# EAGLE board DDS_prototype (EAGLE 9.2.2)
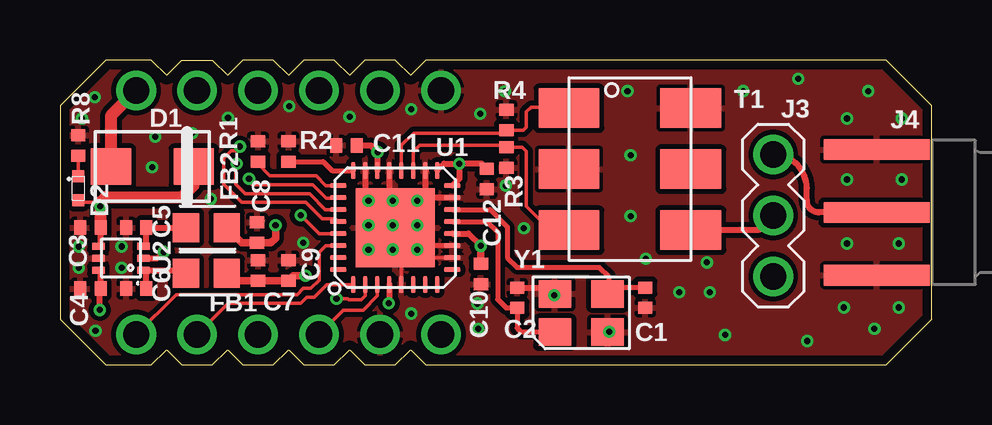
[diagram p0: board, top side]
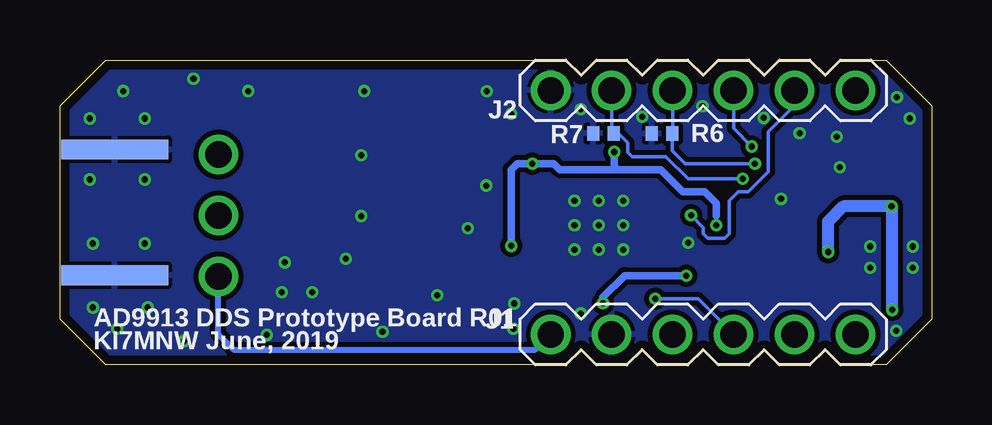
[diagram p1: board, bottom side, seen from below]

Size 36.32 x 12.7 mm. Coordinates in mm from the lower left corner, seen from the top.
Outline: 1.91,0 3.81,0 4.45,0.64 5.08,0 6.35,0 6.99,0.64 7.62,0 8.89,0 9.53,0.64 10.16,0 11.43,0 12.06,0.64 12.7,0 13.97,0 14.61,0.64 15.24,0 34.42,0 36.32,1.91 36.32,10.79 34.42,12.7 15.24,12.7 14.61,12.06 13.97,12.7 12.7,12.7 12.06,12.06 11.43,12.7 10.16,12.7 9.53,12.06 8.89,12.7 7.62,12.7 6.99,12.06 6.35,12.7 5.08,12.7 4.45,12.06 3.81,12.7 1.91,12.7 0,10.79 0,1.91 1.91,0
Copper layers (1*16): Top 0.035559375mm / dielectric 1.6mm / Bottom 0.035559375mm
Design rules "oshpark-2layer-tented *": minimum track width 6mil, minimum drill 10mil, track to track 6mil, track to pad 6mil, pad to pad 6mil, via to via 6mil, smd to smd 6mil, copper to edge 15mil, drill to drill 6mil, minimum pad ring 5mil, minimum via ring 5mil, stop-mask expansion 2.5mil, vias tented up to drill 20mil, thermal gap 6mil
Net classes: 0 default: clearance 0.205 mm

## Footprints (pad centres in the part's own frame; a part is rotated, then mirrored left to right if it is on the bottom)
0402 = smd 0.5 x 0.6: P$1 -0.425,0; P$2 0.425,0
DO-214BA = smd 1.68 x 1.52: A 1.725,0; K -1.725,0
0402' = smd 0.5 x 0.5: A -0.5,0; K 0.5,0
0603 = smd 1.1 x 1.2: P$1 -0.85,0; P$2 0.85,0
1X6_MALE_HEADER_0.1 = drill 1.1: P$1 6.35,0; P$2 3.81,0; P$3 1.27,0; P$4 -1.27,0; P$5 -3.81,0; P$6 -6.35,0
1X3_MALE_HEADER_0.1 = drill 1.1: P$1 2.54,0; P$2 0,0; P$3 -2.54,0
EMPCB.SMAFSTJ.B.HT = smd 0.85 x 4.46: P$1 0,0; P$2 -2.62,0; P$3 2.62,0 | smd 0.85 x 4.46 bottom: P$4 -2.62,0; P$5 2.62,0
CD637 = smd 1.651 x 2.54: P$1 -2.54,-2.54; P$2 0,-2.54; P$3 2.54,-2.54; P$4 2.54,2.54; P$5 0,2.54; P$6 -2.54,2.54
32-LFCSP = smd 0.7 x 0.2: P$1 -2.375,1.75; P$2 -2.375,1.25; P$3 -2.375,0.75; P$4 -2.375,0.25; P$5 -2.375,-0.25; P$6 -2.375,-0.75; P$7 -2.375,-1.25; P$8 -2.375,-1.75; P$17 2.375,-1.75; P$18 2.375,-1.25; P$19 2.375,-0.75; P$20 2.375,-0.25; P$21 2.375,0.25; P$22 2.375,0.75; P$23 2.375,1.25; P$24 2.375,1.75 | smd 0.2 x 0.7: P$9 -1.75,-2.375; P$10 -1.25,-2.375; P$11 -0.75,-2.375; P$12 -0.25,-2.375; P$13 0.25,-2.375; P$14 0.75,-2.375; P$15 1.25,-2.375; P$16 1.75,-2.375; P$25 1.75,2.375; P$26 1.25,2.375; P$27 0.75,2.375; P$28 0.25,2.375; P$29 -0.25,2.375; P$30 -0.75,2.375; P$31 -1.25,2.375; P$32 -1.75,2.375 | smd 3.3 x 3.3: P$33 0,0
SNT-6A = smd 0.3 x 0.52: P1 -0.5,-0.94; P2 0,-0.94; P3 0.5,-0.94; P4 0.5,0.94; P5 0,0.94; P6 -0.5,0.94
TSX-3225 = smd 1.4 x 1.15: P1 -1.1,-0.8; P2 1.1,-0.8; P3 1.1,0.8; P4 -1.1,0.8

## Placement (x,y rotation side)
C1  7pF  [0402]  24.38,2.79 90 top
C2  7pF  [0402]  19.05,2.79 270 top
C3  0.1u  [0402]  1.27,5.71 0 top
C4  1u  [0402]  1.27,3.17 0 top
C5  1u  [0402]  3.17,5.71 0 top
C6  1u  [0402]  3.17,3.17 0 top
C7  0.1u  [0402]  8.26,3.94 270 top
C8  0.1u  [0402]  8.22,5.51 270 top
C9  100p  [0402]  9.53,3.94 270 top
C10  1u  [0402]  17.54,3.78 90 top
C11  0.1u  [0402]  11.94,9.14 0 top
C12  100p  [0402]  17.78,7.75 90 top
D1  LSM115JE3  [DO-214BA]  3.85,8.26 180 top
D2  [0402']  0.76,7.37 90 top
FB1  BLM18KG102SN1D  [0603]  6.1,3.81 0 top
FB2  BLM18KG102SN1D  [0603]  6.1,5.71 0 top
J1  [1X6_MALE_HEADER_0.1]  9.53,1.27 0 bottom
J2  [1X6_MALE_HEADER_0.1]  9.53,11.43 0 bottom
J3  [1X3_MALE_HEADER_0.1]  29.72,6.22 90 top
J4  [EMPCB.SMAFSTJ.B.HT]  34.04,6.35 90 top
R1  100k  [0402]  8.26,8.89 270 top
R2  4.65k  [0402]  9.53,8.89 270 top
R3  49.9  [0402]  18.6,8.64 270 top
R4  49.9  [0402]  18.6,10.21 270 top
R6  100k  [0402]  11.25,9.64 0 bottom
R7  100k  [0402]  13.68,9.64 0 bottom
R8  470  [0402]  0.76,9.14 270 top
T1  ADTT1-6+  [CD637]  23.75,8.15 270 top
U1  AD9913  [32-LFCSP]  13.97,5.71 90 top
U2  S-1711A1818-I6T1U  [SNT-6A]  2.54,4.45 90 top
Y1  TSX-3225 25.0000MF10P-C0  [TSX-3225]  21.72,2.16 0 top

## Library data of the parts
C1-C12 = Capacitors
D1 D2 = Diodes
FB1 FB2 = Inductors
J1-J4 = Connectors
R1-R4 R6-R8 = Resistors
T1 U1 U2 = ICs
Y1 = Crystals

## Nets
3V3: D1.A J2.P$1
3V3_PROT: C3.P$2 C4.P$2 D1.K D2.A U2.P2 U2.P4 U2.P6
CS_N: J2.P$3 U1.P$28
DDS: J3.P$2 T1.P$4
DDS_COAX: J3.P$1 J4.P$1
DDS_OUT: J1.P$6 J3.P$3
GND: C1.P$1 C2.P$1 C3.P$1 C4.P$1 C5.P$1 C6.P$1 C7.P$1 C8.P$1 C9.P$1 C10.P$1 C11.P$1 C12.P$1 J1.P$5 J2.P$6 J4.P$2 J4.P$3 J4.P$4 J4.P$5 R1.P$1 R2.P$1 R3.P$2 R4.P$1 R6.P$1 R7.P$1 R8.P$1 T1.P$2 T1.P$6 U1.P$5 U1.P$10 U1.P$11 U1.P$15 U1.P$18 U1.P$21 U1.P$23 U1.P$33 U2.P5 Y1.P2 Y1.P4
IO_UPDATE: J2.P$4 R6.P$2 U1.P$27
IOUT: R3.P$1 T1.P$3 U1.P$19
IOUT_N: R4.P$2 T1.P$1 U1.P$20
MSTR_RST: R1.P$2 U1.P$25
N$1: D2.K R8.P$2
N$7: C1.P$2 U1.P$14 Y1.P3
N$14: C2.P$2 U1.P$13 Y1.P1
PS0: J1.P$4 U1.P$3
PS1: J1.P$3 U1.P$2
PS2: J1.P$2 U1.P$1
PWR_DWN_CTRL: J2.P$5 R7.P$2 U1.P$26
RSET: R2.P$2 U1.P$24
SCLK: J1.P$1 U1.P$30
SDIO: J2.P$2 U1.P$29
VCC: C8.P$2 C10.P$2 C11.P$2 C12.P$2 FB2.P$2 U1.P$12 U1.P$16 U1.P$17 U1.P$22
VCC_UNFILT: C6.P$2 FB1.P$1 U2.P1
VDD: C7.P$2 C9.P$2 FB1.P$2 U1.P$4
VDD_UNFILT: C5.P$2 FB2.P$1 U2.P3

## Tracks (layer width: path | path; a pad name or v marks a point on that pad's centre or on a via)
3V3
  Top 0.508: J2.P$1 2.12,10.38 D1.A
3V3_PROT  (via drill 0.25)
  Top 0.152: v1.68,6.6 1.68,6.76 1.7,6.78 0.85,6.78 D2.A | 1.7,3.43 C4.P$2 1.7,2.96 1.65,2.92
  Top 0.254: v1.65,2.29 1.65,2.92 | U2.P4 1.7,5.04 C3.P$2 | U2.P6 1.7,3.85 1.7,3.43 | U2.P2 4.06,4.45 v4.32,4.7
  Top 0.508: C3.P$2 1.7,6.78 1.91,6.99 5.08,6.99 5.57,7.48 D1.K
  Bottom 0.152: v1.68,6.6 1.65,6.6
  Bottom 0.508: v1.68,6.6 1.65,6.58 v1.65,2.29 | v4.32,4.7 4.32,5.97 3.68,6.6 1.65,6.6
CS_N  (via drill 0.25)
  Top 0.152: U1.P$28 11.48,6.08 10.94,6.08 10.25,6.77 7.58,6.77 6.83,7.51 6.83,8.6 7.14,8.92 7.32,8.92 v7.5,9.1
  Bottom 0.152: v7.5,9.1 8.26,9.85 J2.P$3
DDS
  Top 0.254: J3.P$2 29.11,5.61 T1.P$4
DDS_COAX
  Top 0.254: J4.P$1 31.62,6.35 arc-90 31.11,6.86 31.11,7.37 arc90 J3.P$1
DDS_OUT
  Bottom 0.254: J3.P$3 29.72,1.27 29.08,0.64 16.51,0.64 J1.P$6
GND  (via drill 0.25)
  Top 0.152: U1.P$5 14.22,4.57 14.22,5.08 | 14.22,5.08 14.22,5.46 U1.P$33 | U1.P$10 14.84,4.46 14.22,5.08
  Top 0.203: U1.P$11 15.05,4.96 v14.88,4.8 | v12.85,6.83 U1.P$33 12.72,6.96 12.72,7.26
  Top 0.254: U1.P$23 12.72,7.26 12.7,7.24 | U1.P$18 15.24,8.07 15.24,7.11 15.3,7.05 | U1.P$15 15.39,6.96 15.3,7.05 | U1.P$33 15.3,7.05 | U1.P$21 13.72,7.12 13.72,7.11 | C2.P$1 20.36,3.22 Y1.P4
  other vias: 2.57,4.93 0.79,4.04 3.84,8.23 14.88,6.83 13.87,6.83 12.85,5.82 14.88,5.82 13.87,5.82 12.85,4.8 13.87,4.8 22.89,1.37 32.66,2.39 32.79,5.05 32.79,7.72 32.79,10.26 35.08,10.26 35.08,7.72 34.95,5.05 34.95,2.39 0.79,4.93 2.57,4.04 9.55,10.77 14.63,10.64 20.6,2.9 3.96,9.5 1.45,11.15 0.91,10.26 1.48,1.42 14.63,2.13 17.42,1.5 17.39,2.56 33.93,1.5 23.77,8.74 23.77,6.2 23.65,11.4 28.47,11.4 33.68,11.4 18.54,11.4 18.57,7.47 19.33,5.69 17.52,10.46 24.41,4.42 26.96,4.27 27.08,3.02 25.81,3.02 27.71,1.24 31.14,0.99 30.76,11.91 7,10.29 12.07,10.33 10.14,5.08 6.28,6.91 5.51,9.65
  pour Top: 0,0 0,13.08 37.34,13.08 37.34,0
  pour Bottom: -0.64,0 36.96,0 36.96,12.95 -0.64,12.95
IO_UPDATE  (via drill 0.25)
  Top 0.152: U1.P$27 11.06,6.46 10.4,7.13 7.72,7.13 7.33,7.52 7.33,8.34 v7.37,8.38
  Bottom 0.152: J2.P$4 10.79,9.97 10.82,9.95 R6.P$2 10.82,8.93 10.28,8.38 v7.37,8.38
IOUT
  Top 0.152: U1.P$19 14.72,8.88 14.99,9.14 18.52,9.14 R3.P$1 19.25,9.07 19.43,8.89 19.43,6.6 20.42,5.61 T1.P$3
IOUT_N
  Top 0.152: U1.P$20 14.22,9.14 14.73,9.65 18.47,9.65 R4.P$2 19.31,9.78 19.43,9.91 19.43,10.54 19.63,10.74 21.16,10.74 T1.P$1
MSTR_RST
  Top 0.152: 8.23,8.39 8.74,7.87 10.67,7.87 11.08,7.46 U1.P$25
  Top 0.203: R1.P$2 8.23,8.44 8.23,8.39
N$1
  Top 0.152: D2.K R8.P$2
N$7
  Top 0.203: C1.P$2 23.08,3.22 Y1.P3 22.86,3 22.86,3.68 22.48,4.06 19.05,4.06 18.64,4.47 18.64,5.74 17.92,6.46 U1.P$14
N$14
  Top 0.203: Y1.P1 19.21,1.36 19.05,1.52 C2.P$2 18.59,2.37 18.23,2.72 18.23,5.54 17.81,5.96 U1.P$13
PS0
  Top 0.152: J1.P$4 11.8,2.28 12.63,2.28 13.22,2.88 U1.P$3
PS1  (via drill 0.25)
  Top 0.152: U1.P$2 12.72,2.88 12.55,2.71 12.03,2.71 11.99,2.75 v11.52,2.75
  Bottom 0.152: v11.52,2.75 9.74,2.75 J1.P$3
PS2
  Top 0.152: J1.P$2 7.02,2.57 10.04,2.57 10.29,2.82 10.6,2.82 11.12,3.34 U1.P$1
PWR_DWN_CTRL  (via drill 0.25)
  Top 0.152: v7.87,7.75 7.87,7.62 8,7.49 10.54,7.49 11.09,6.95 11.58,6.95 U1.P$26
  Bottom 0.152: v7.87,7.75 10.15,7.75 11.07,8.67 12.48,8.67 12.67,8.86 12.67,9.25 13.06,9.64 R7.P$2 13.34,9.72 J2.P$5
RSET
  Top 0.203: R2.P$2 10.97,8.46 11.34,8.09 U1.P$24
SCLK
  Top 0.152: J1.P$1 4.83,2.93 9.89,2.93 10.14,3.18 10.45,3.18 10.81,3.53 10.81,4.69 11.08,4.96 U1.P$30
SDIO  (via drill 0.25)
  Top 0.152: U1.P$29 10.8,5.46 v10.03,6.23
  Bottom 0.152: v10.03,6.23 9.52,5.72 9.52,5.46 9.34,5.28 8.62,5.28 8.45,5.46 8.45,6.83 8.06,7.21 7.65,7.21 6.81,8.05 6.81,9.72 5.71,10.81 J2.P$2
VCC  (via drill 0.25)
  Top 0.254: U1.P$22 v13.22,8.85 v13.23,8.87 12.95,9.14 C11.P$2 | U1.P$12 17.01,5.46 v17.53,4.95 | v16.64,8.38 16.64,7.76 U1.P$16 | U1.P$17 16,8.38 v16.64,8.38 | C12.P$2 17.57,8.38 v16.64,8.38
  Top 0.305: FB2.P$2 7.58,5.08 C8.P$2 8.79,5.08 8.98,5.27 v8.98,5.82 | v17.53,4.95 v17.54,4.94 C10.P$2 | v8.98,5.82
  Bottom 0.152: v8.98,5.82 8.98,6.21
  Bottom 0.305: 13.08,8.13 13.23,8.28 v13.23,8.87 | 13.08,8.13 15.49,8.13 15.75,8.38 v16.64,8.38 17.27,8.38 17.53,8.13 v17.53,4.95 | 13.08,8.13 11.29,8.13 10.37,7.21 9.47,7.21 8.98,6.72 8.98,6.21
VCC_UNFILT
  Top 0.254: C6.P$2 3.6,3.94 U2.P1 5.25,3.94 FB1.P$1
VDD  (via drill 0.25)
  Top 0.254: U1.P$4 13.72,2.58 v13.7,2.56
  Top 0.305: 7.24,3.51 C7.P$2 C9.P$2 9.73,3.71 v10.23,3.71
  Top 0.508: FB1.P$2 7.24,3.51
  Bottom 0.305: v13.7,2.56 13.7,2.81 12.79,3.71 v10.23,3.71
VDD_UNFILT
  Top 0.254: U2.P3 3.6,4.95 C5.P$2 FB2.P$1

## Text on the board
bPlace: AD9913 DDS Prototype Board R01 | KI7MNW June, 2019